# Altium PCB led-wt32-eth01.PcbDoc
Units mil, origin at the board's own origin, x right, y up, seen from the top; angles counter-clockwise.
Board outline 1889.76 x 2283.46 mil, 4 copper layers (Top Layer, Layer 1, Layer 2, Bottom Layer), stack 62.417 mil thick; 25 components, 25 nets, 122 pads, 46 vias.
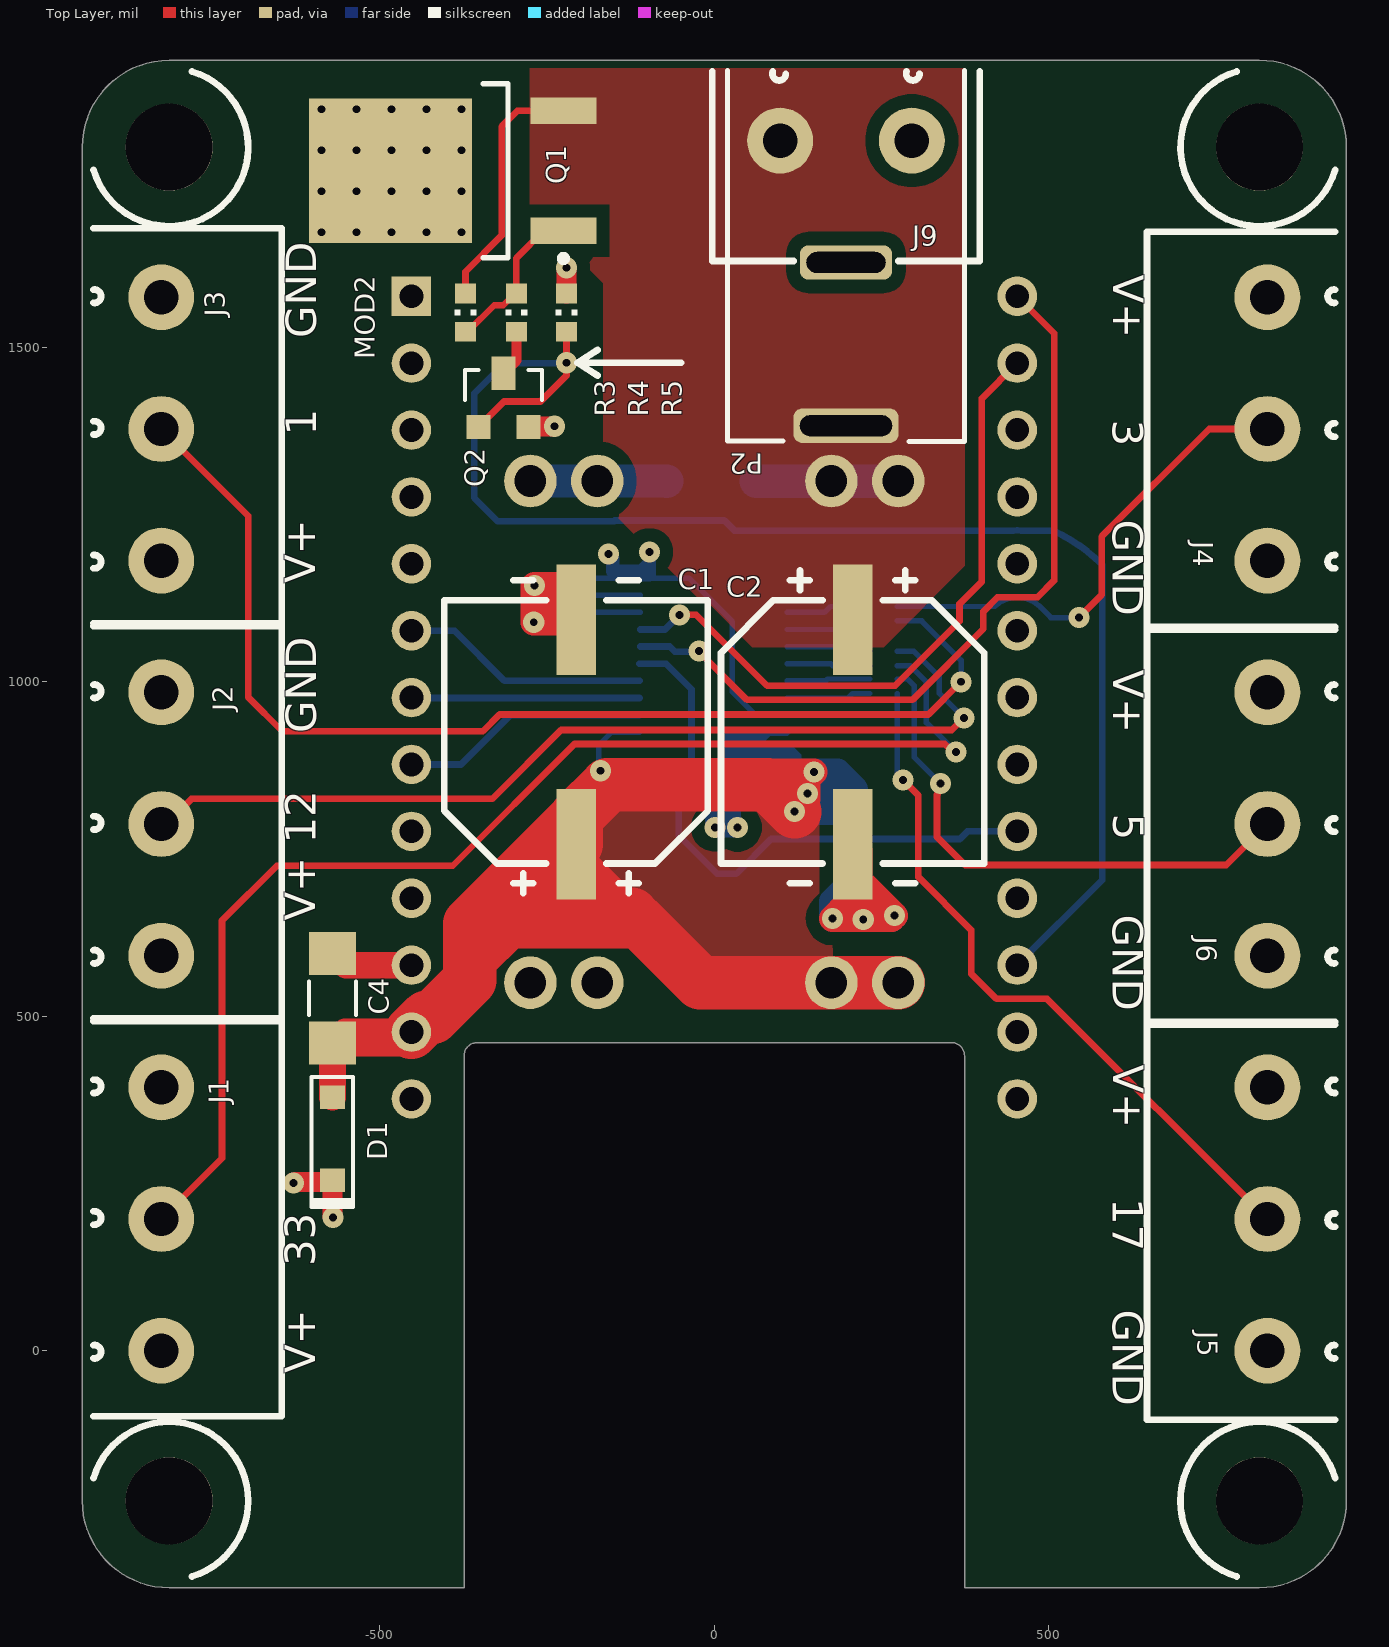
[diagram p0: Top Layer view]
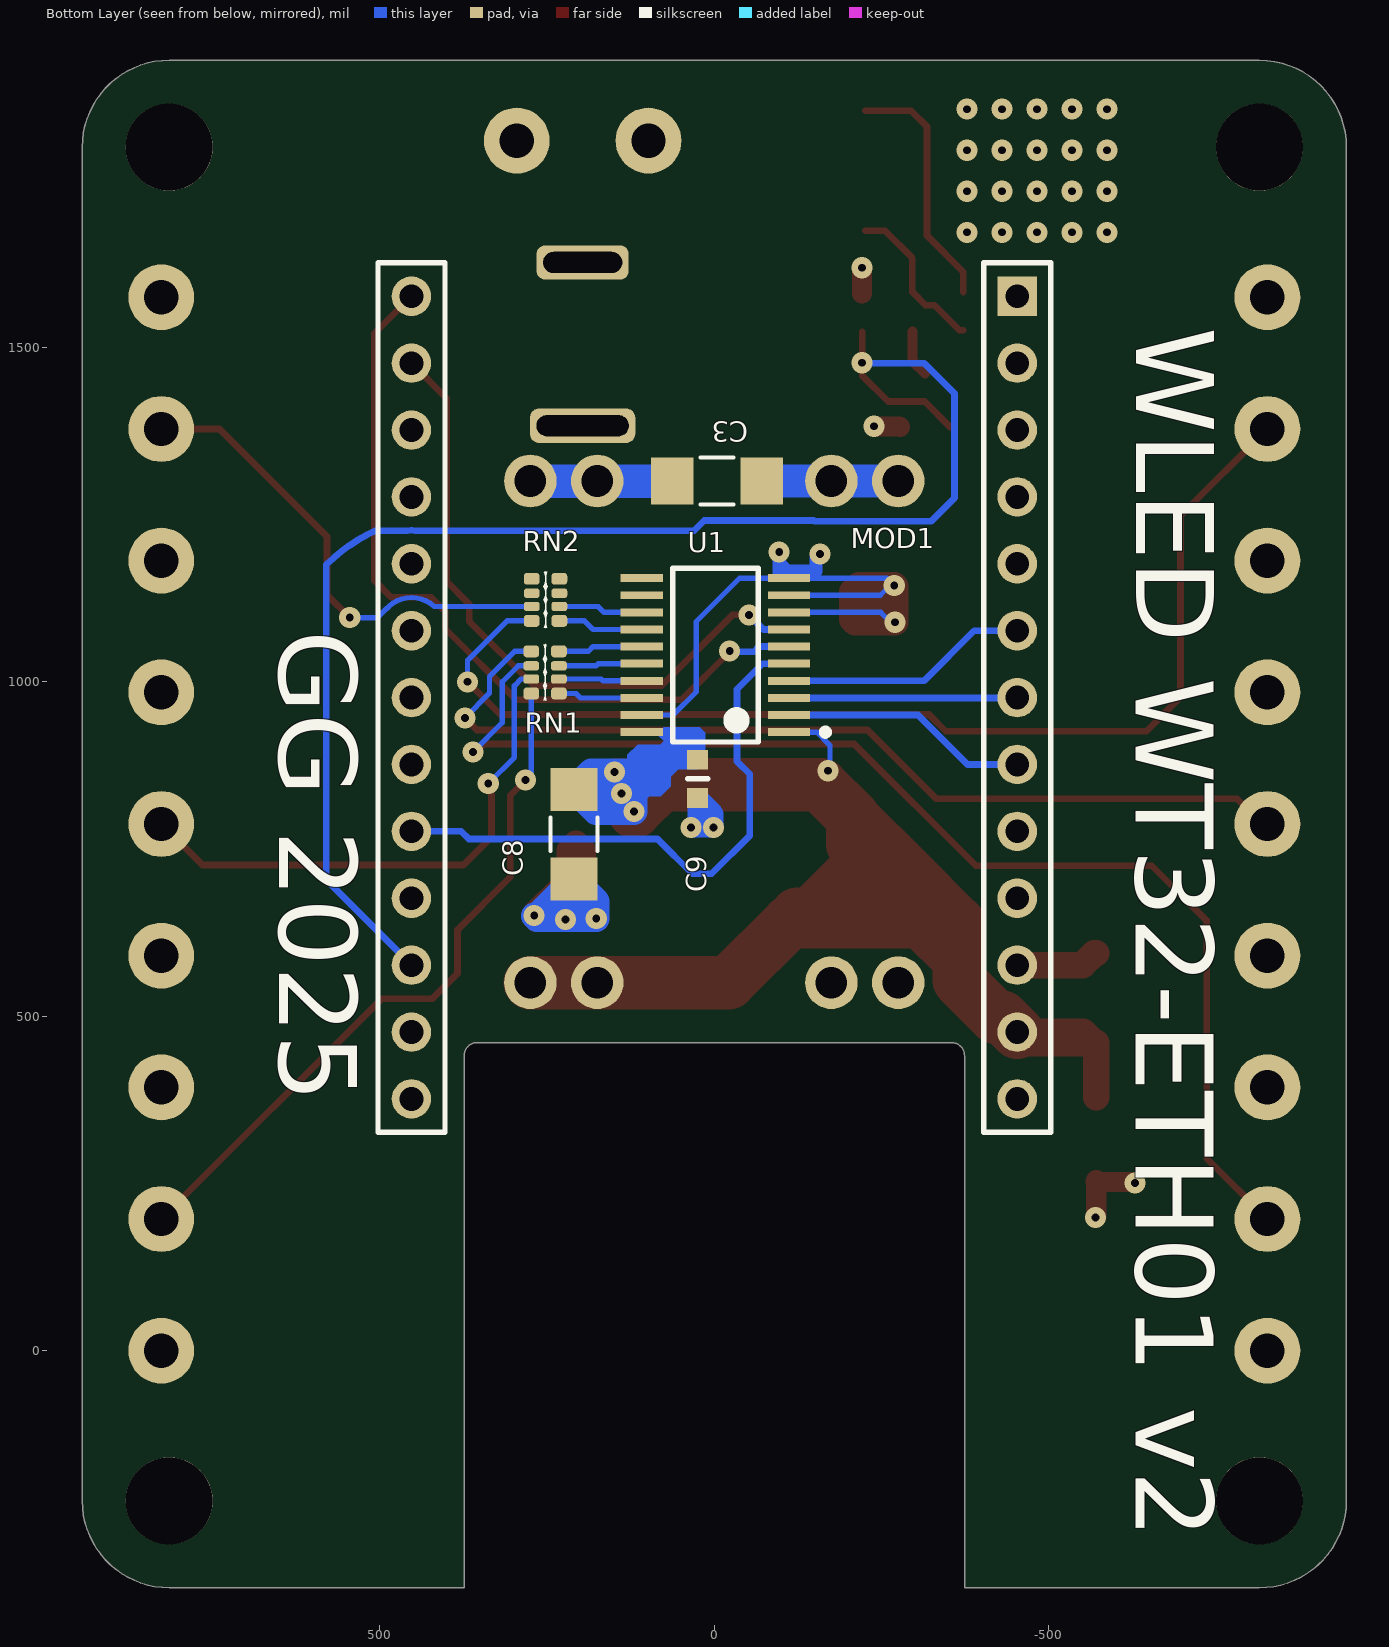
[diagram p1: Bottom Layer view, seen from below]
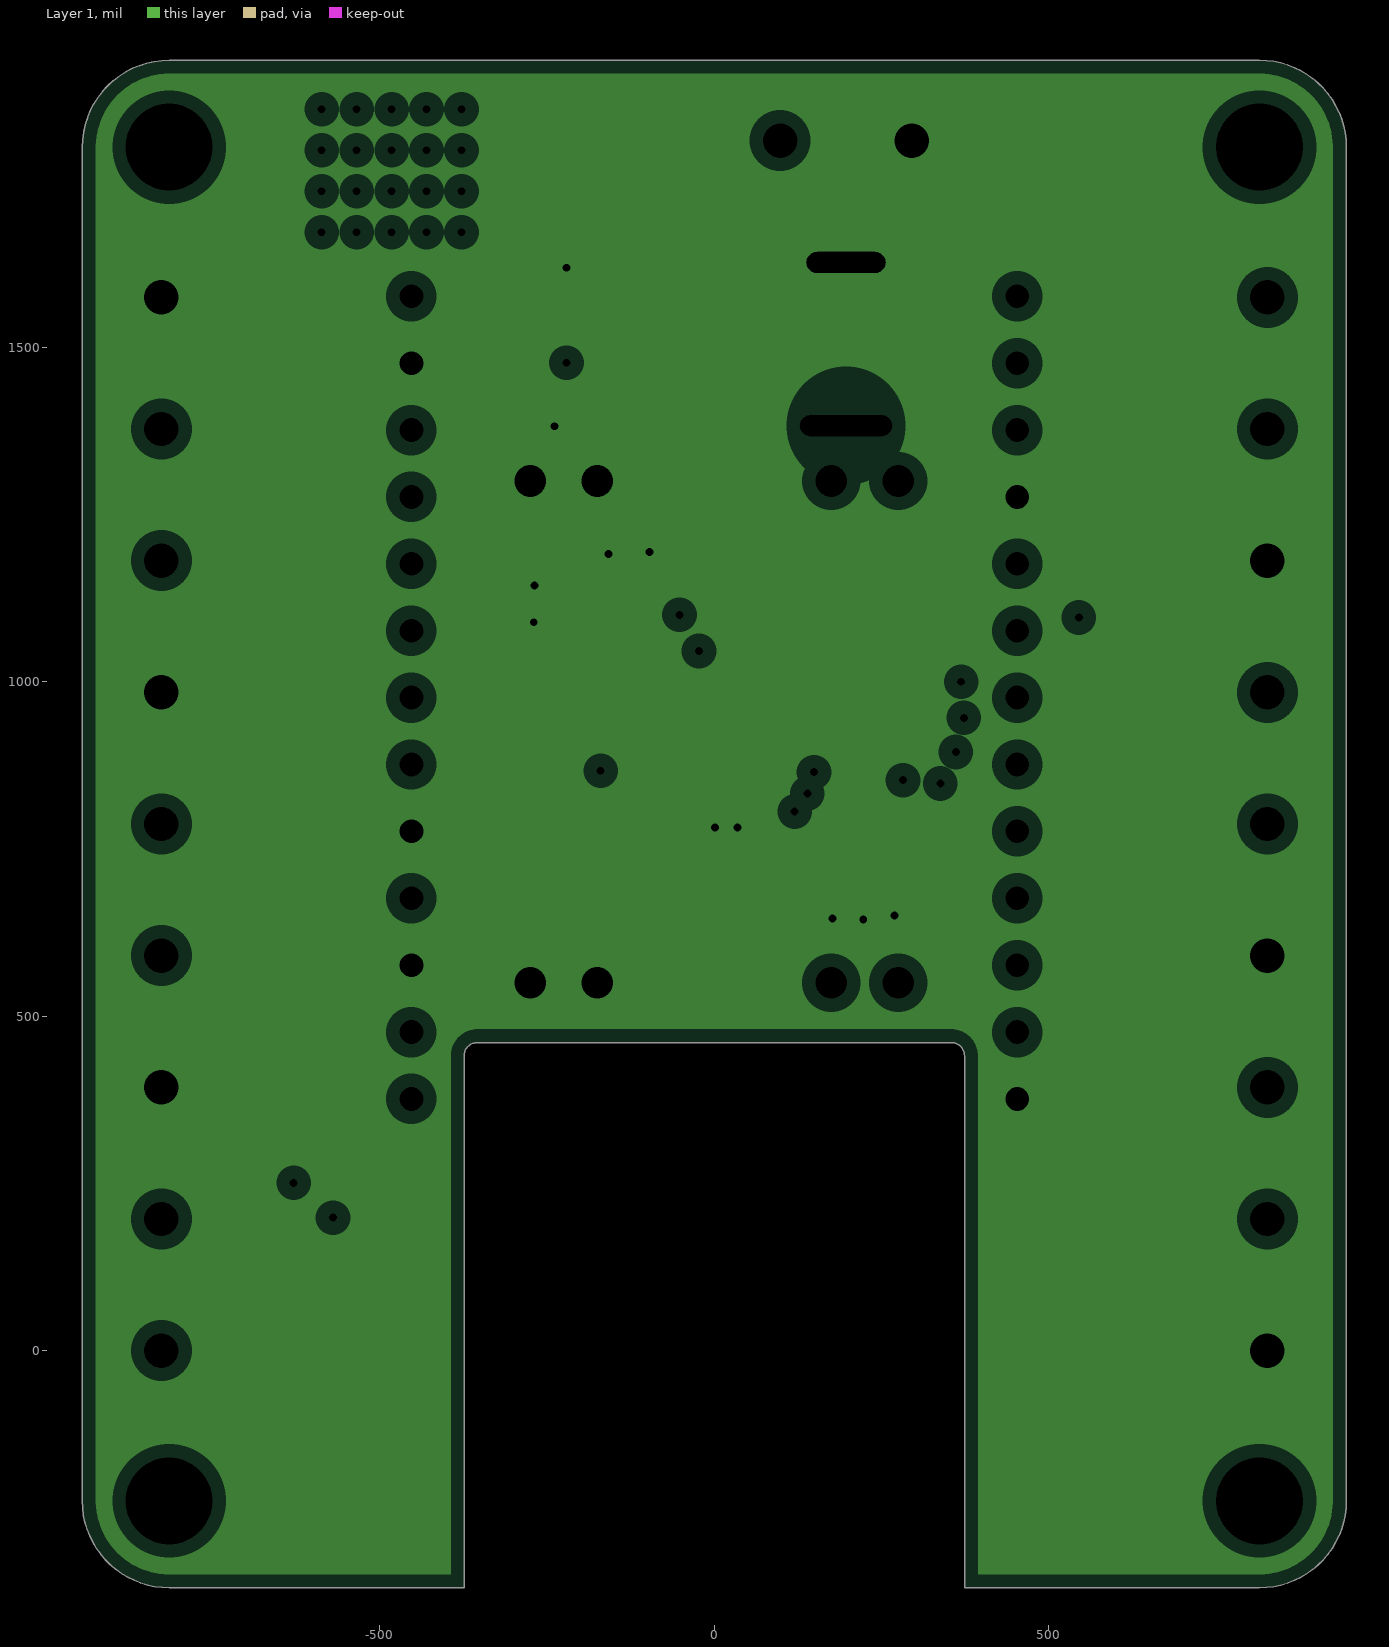
[diagram p2: Layer 1, clearances drawn from the general rule]
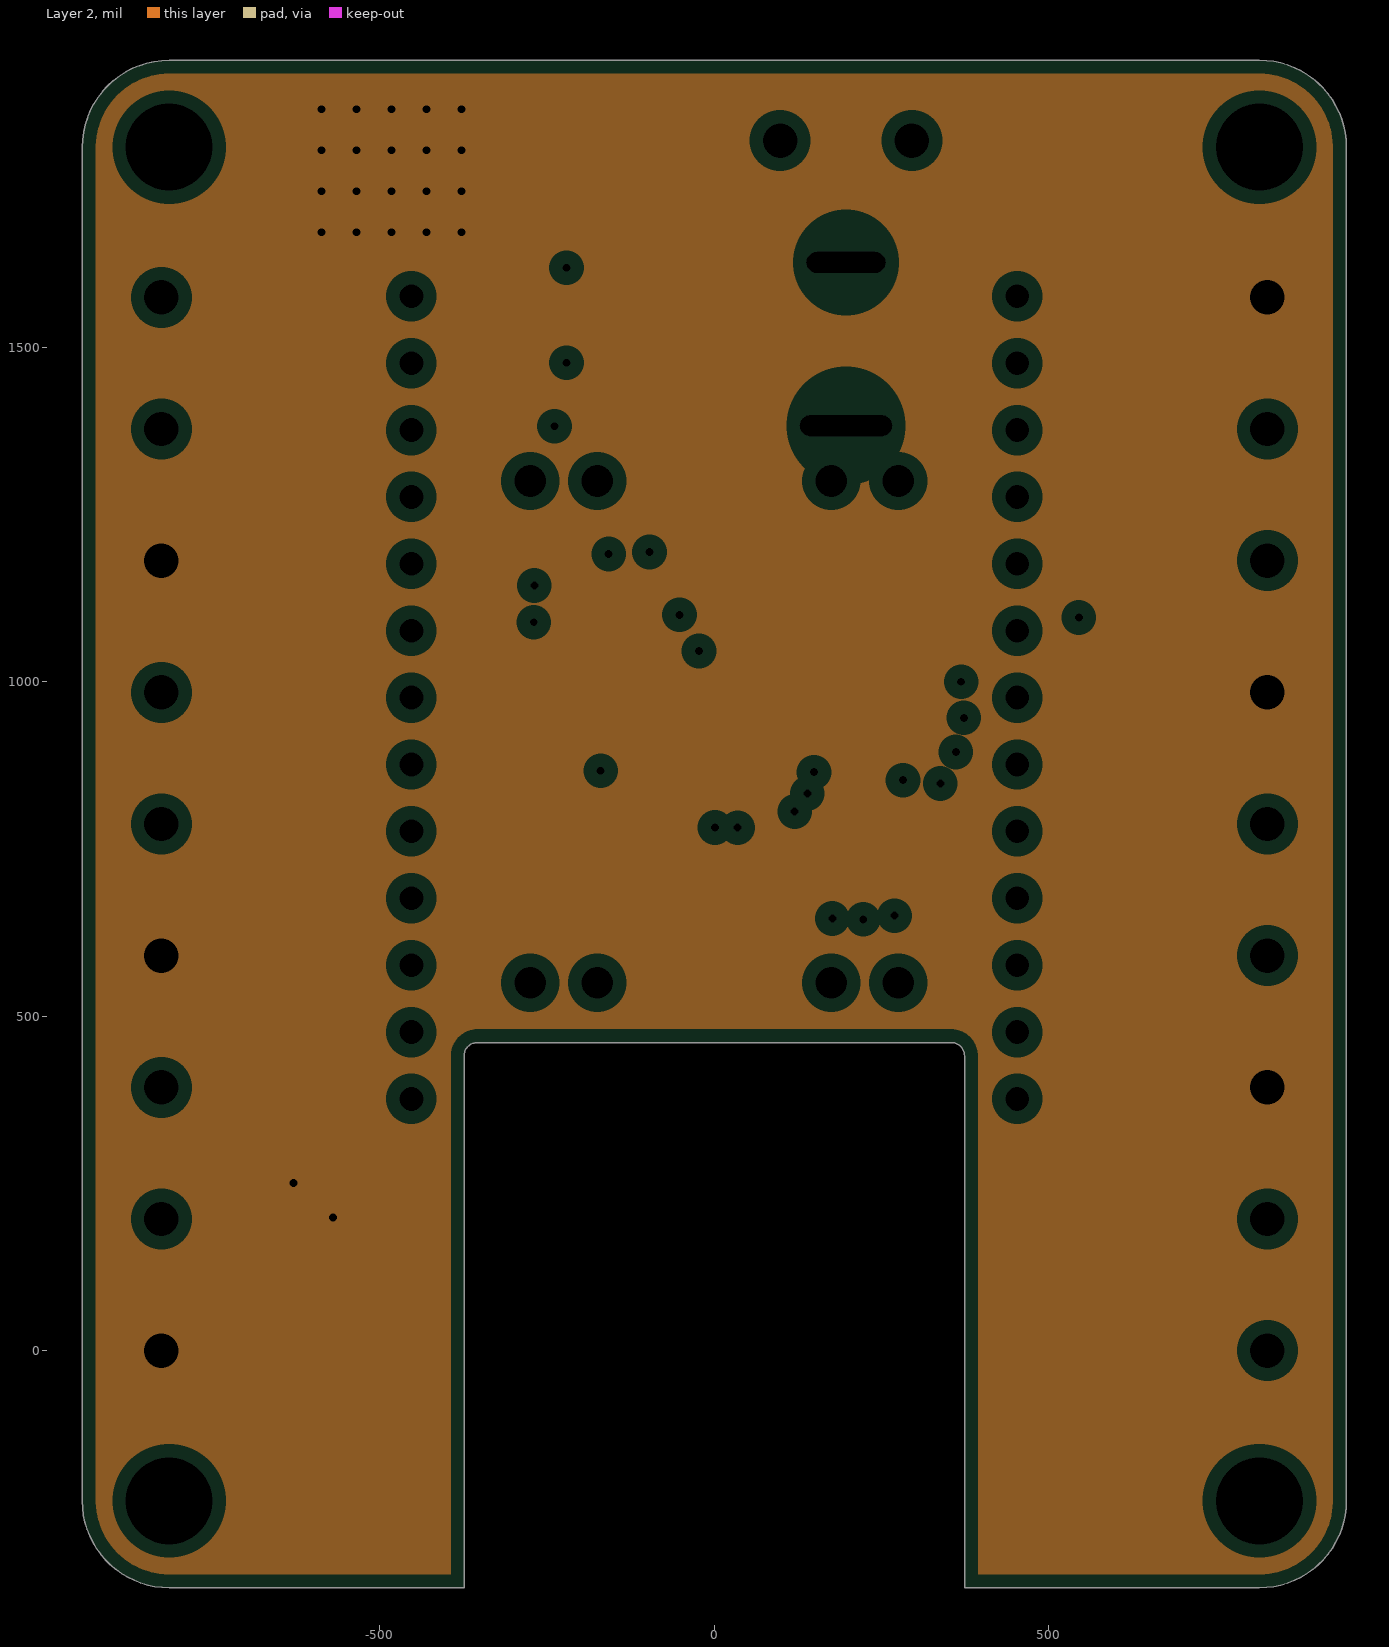
[diagram p3: Layer 2, clearances drawn from the general rule]
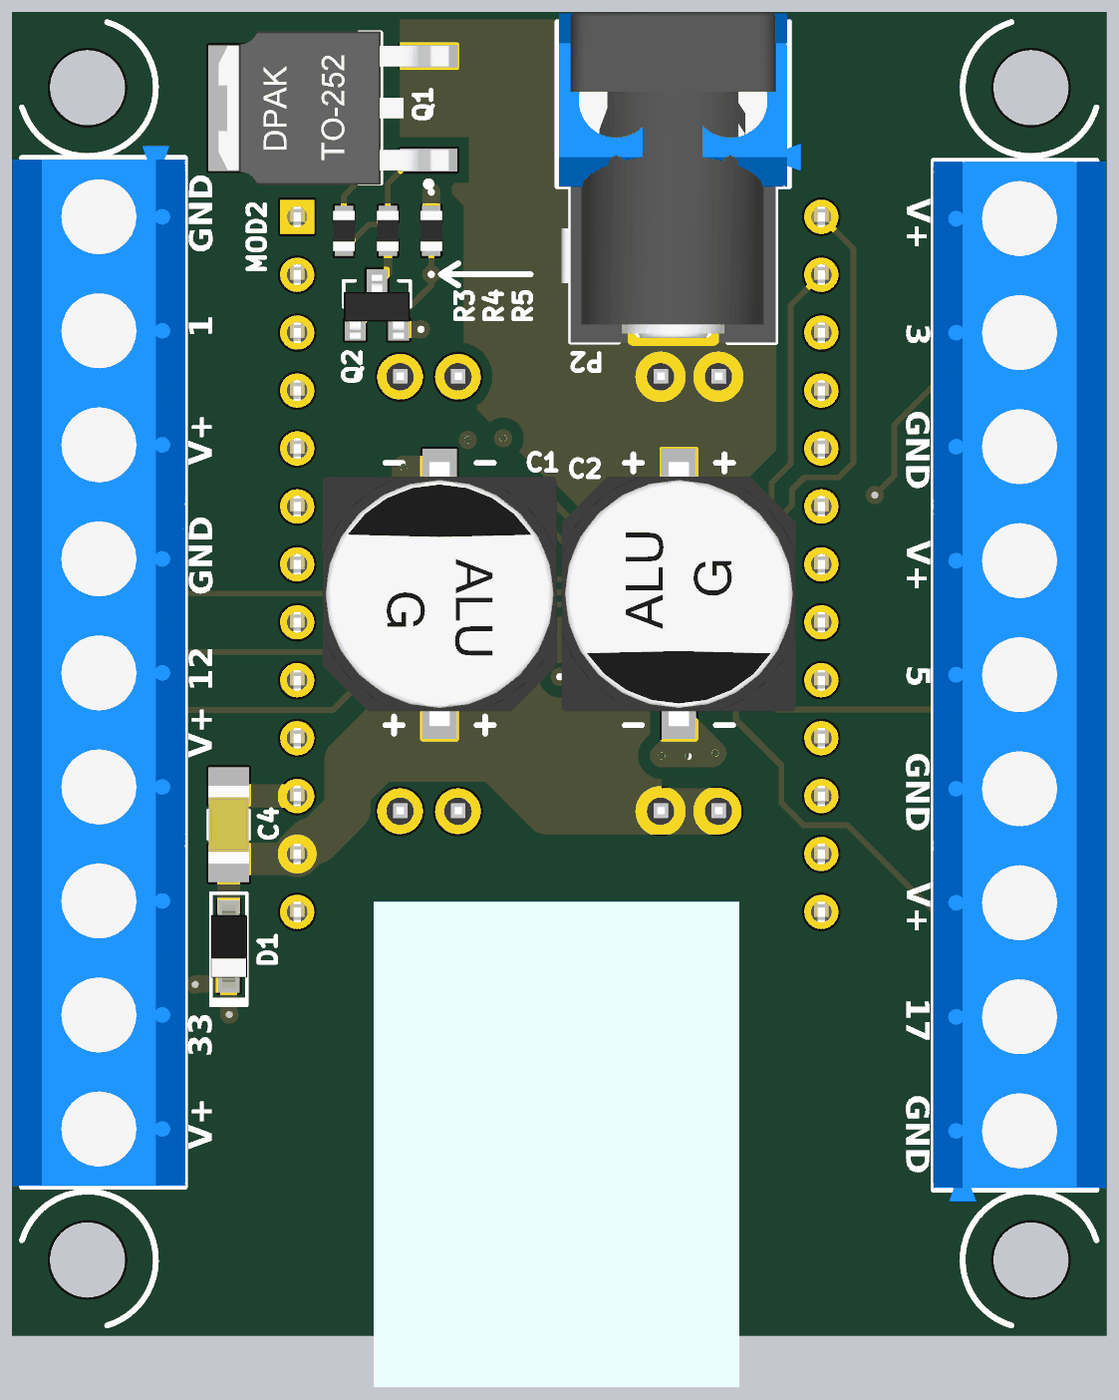
[diagram p4: 3D render of the assembled board from above, using the file's embedded part models]
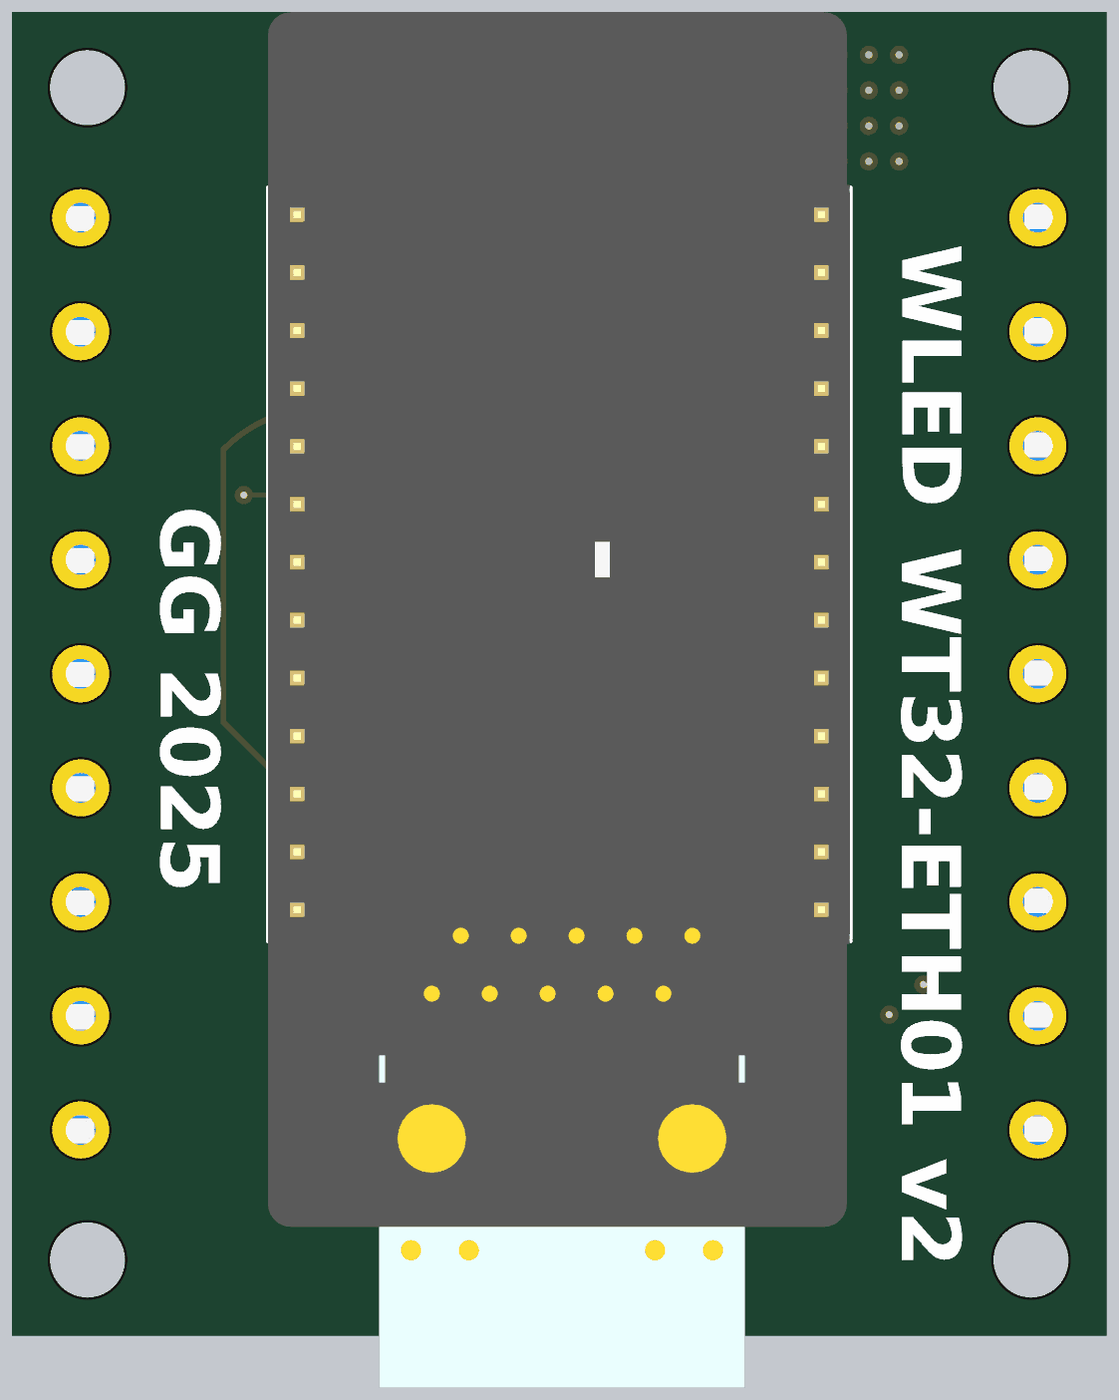
[diagram p5: 3D render of the assembled board from below, using the file's embedded part models]

## Layer stack, top to bottom
Top Solder: solder mask 0.4, Solder Resist, Dk 3.5
Top Layer: signal copper 1.378
Dielectric 2: prepreg 8.2677, PP-006, Dk 4.1
Layer 1: plane copper 0.5984, net GND
Dielectric 1: dielectric 41.9291, FR-4, Dk 4.8
Layer 2: plane copper 0.5984, net VLED
Dielectric 3: prepreg 8.2677, PP-006, Dk 4.1
Bottom Layer: signal copper 1.378
Bottom Solder: solder mask 0.4, Solder Resist, Dk 3.5

## Board outline
-814.96,-354.33 cw(c-814.96,-224.41) -944.88,-224.41 -944.88,1799.21 cw(c-814.96,1799.21) -814.96,1929.13 814.96,1929.13 cw(c814.96,1799.21) 944.88,1799.21 944.88,-224.41 cw(c814.96,-224.41) 814.96,-354.33 374.02,-354.33 374.02,440.94 ccw(c354.33,440.94) 354.33,460.63 -354.33,460.63 ccw(c-354.33,440.94) -374.02,440.94 -374.02,-354.33

## Design rules (kind name [scope] priority, off if disabled: settings)
BoardOutlineClearance [All] p1: gap=11.81 ignorepadtopadclearanceinfootprint=FALSE
Clearance Clearance_polygon [InPolygon] p1: gap=20 ignorepadtopadclearanceinfootprint=FALSE
Clearance [All] p2: gap=8 ignorepadtopadclearanceinfootprint=TRUE
ComponentClearance ComponentClearance_1 [InComponent('R6') vs InComponent('R8')] p1: gap=-39.37 collisioncheckmode=3 verticalgap=-39.37 showdistances=FALSE
ComponentClearance ComponentClearance_3 [HasFootprint('J_ARK3') vs HasFootprint('J_ARK3')] p2: gap=-39.37 collisioncheckmode=3 verticalgap=-39.37 showdistances=FALSE
ComponentClearance ComponentClearance_2 [HasFootprint('J_ARK2') vs HasFootprint('P_KLDX-0202-A')] p3: gap=-309.37 collisioncheckmode=3 verticalgap=-39.37 showdistances=FALSE
ComponentClearance ComponentClearance_4 [HasFootprint('MOD_BUCK_MP1584') vs HasFootprint('P_KLDX-0202-A')] p4: gap=-309.37 collisioncheckmode=3 verticalgap=-39.37 showdistances=FALSE
ComponentClearance ComponentClearance_5 [HasFootprint('CE_D_10x10_SMD') vs HasFootprint('CE_D_10x10_SMD')] p5: gap=1 collisioncheckmode=3 verticalgap=1 showdistances=FALSE
ComponentClearance [All] p6: gap=10 collisioncheckmode=3 verticalgap=10 showdistances=FALSE
HoleSize [All] p1: absolutevalues=TRUE maxlimit=157.48 minlimit=11.81 maxpercent=80.000 minpercent=20.000
MinimumAnnularRing [All] p1: minimumring=7
MinimumSolderMaskSliver [All] p1: minsoldermaskwidth=5
PlaneClearance [All] p1: clearance=20
PlaneConnect [All] p1: planeconnectstyle=Direct reliefexpansion=20 reliefentries=4 reliefconductorwidth=10 reliefairgap=10
PolygonConnect VIA [IsVia] p1: connectstyle=Direct reliefconductorwidth=10 reliefentries=4 polygonreliefangle="90 Angle" airgapwidth=10
PolygonConnect [All] p2: connectstyle=Direct reliefconductorwidth=30 reliefentries=4 polygonreliefangle="90 Angle" airgapwidth=15
RoutingVias [All] p1: holewidth=11.81 width=31.5 viastyle="Through Hole" minholewidth=11.81 minwidth=31.5 maxholewidth=11.81 maxwidth=31.5
SilkToSilkClearance [All] p1: silktosilkclearance=1
SilkToSolderMaskClearance [IsPad] p1: minsilkscreentomaskgap=1 clearancetoexposedcopper=TRUE
SolderMaskExpansion [All] p1: expansion=4 istentingtop=FALSE
SupplyNets "Schematic Supply Nets_1" [InNet('VLED')] p1: voltage=0.000
SupplyNets "Schematic Supply Nets_5" [InNet('VIN')] p2: voltage=0.000
SupplyNets "Schematic Supply Nets_2" [InNet('GND')] p3: voltage=0.000
SupplyNets "Schematic Supply Nets" [InNet('+5V')] p4: voltage=0.000
Width [All] p1: maxlimit=150 minlimit=7 preferedwidth=10 minimp=50.000000 maximp=50.000000 favimp=50.000000
23 further rules are at their usual default settings.

## Components (designator, comment, footprint, x,y, rotation, side; value= is the part's Value field where it differs from the comment)
C1 "Electrolytic Capacitor" CE_D_10x10_SMD 206.69,925.2 r270 top locked value=100uF
C2 "Electrolytic Capacitor" CE_D_10x10_SMD -206.69,925.2 r90 top locked value=100uF
C3 "Ceramic X7R" C_1206_3216 -4,1300 r180 bottom value=10uF
C4 "Ceramic X7R" C_1206_3216 -571,527 r90 top value=10uF
C8 "Ceramic X7R" C_1206_3216 210,772 r270 bottom value=10uF
C9 "Ceramic X7R" C_0603_1608 24.85,855 r270 bottom value=100nF
D1 "1N4148W" SOD123 -571,317 r90 top value=1N4148W-E3-08
J1 "ARK3" J_ARK3 -826.77,196.85 r90 top locked value=DG301-5.0-03P-12-18A(H)
J2 "ARK3" J_ARK3 -826.77,787.4 r90 top locked value=DG301-5.0-03P-12-18A(H)
J3 "ARK3" J_ARK3 -826.77,1377.95 r90 top locked value=DG301-5.0-03P-12-18A(H)
J4 "ARK3" J_ARK3 826.77,1377.95 r270 top locked value=DG301-5.0-03P-12-18A(H)
J5 "ARK3" J_ARK3 826.77,196.85 r270 top locked value=DG301-5.0-03P-12-18A(H)
J6 "ARK3" J_ARK3 826.77,787.4 r270 top locked value=DG301-5.0-03P-12-18A(H)
J9 "ARK2" J_ARK2 196.85,1809 r0 top value=DG301-5.0-02P-12-18A(H)
MOD1 "Low cost, Aliexpress-ready DC-DC buck converter using MP1584" MOD_BUCK_MP1584 0,925.2 r270 bottom locked value=-
MOD2 "ESP32 with 10/100 Mbps Ethernet PHY" MOD_WT32-ETH01 0,976.38 r0 top locked value=MOD_WT32-ETH01
P2 "DC JACK" P_KLDX-0202-A 196.85,1626.9 r90 top locked value=KLDX-0202-A
Q1 "AOD423" DPAK_TO252-3_SC63_M -391,1764 r180 top
Q2 "2N7002K-7" SOT23_TO236_SC59 -315,1421 r0 top
R3 "Resistor" R_0603_1608 -372,1552 r90 top value=10k
R4 "Resistor" R_0603_1608 -296,1552 r270 top value=10k
R5 "Resistor" R_0603_1608 -221,1552 r90 top value=10k
RN1 "Resistors Network" RN4_0804_2010 253,1014 r0 bottom value=120R
RN2 "Resistors Network" RN4_0804_2010 252.33,1122.5 r0 bottom value=120R
U1 "SN74HCT245PWR" FP-PW0020A-MFG -1.64,1039.84 r0 bottom locked

## Footprints (in the part's own frame and the unit in brackets; to place one, negate y for a bottom-side part, rotate by r counter-clockwise, add the part's x,y. Pads: shape width x height; smd on the part's side, far side on the other; paste and mask are expansions set on the pad)
C_0603_1608 [mm]
  rect 0.75x0.8 smd: 1(-0.725,0) 2(0.725,0)
  silkscreen extent 0,-0.38 0,0.38, body extent -0.85,-0.45 0.85,0.45, height 0.89
C_1206_3216 [mil]
  rect 64x70 smd: 1(-67,0) 2(67,0)
  silkscreen extent -25,-35 25,35, body extent -67,-35 67,35, height 39
CE_D_10x10_SMD [mm]
  rect 4.2x1.5 smd: 1(-4.262,0) 2(4.262,0)
  silkscreen extent -6.13,-5 5.75,5, body extent -5.8,-5.15 5.8,5.15, height 10.21
DPAK_TO252-3_SC63_M [mm] "D-PAK, 3-Pads+1-heatsink, Body 6,20x6,60mm (max), IPC Medium Density"
  rect 2.5x1 smd: 1(-4.2,2.28) 3(-4.2,-2.28)
  rect 6.2x5.5 smd: 2(2.362,0)
  silkscreen extent -4.33,-3.3 -1.15,3.45, body extent -5.08,-3.37 5.02,3.37, height 2.37
FP-PW0020A-MFG [mm]
  rect 1.6x0.3 smd paste-1000 mask+0: 1(-2.8,2.925) 2(-2.8,2.275) 3(-2.8,1.625) 4(-2.8,0.975) 5(-2.8,0.325) 6(-2.8,-0.325) 7(-2.8,-0.975) 8(-2.8,-1.625) 9(-2.8,-2.275) 10(-2.8,-2.925) 11(2.8,-2.925) 12(2.8,-2.275) 13(2.8,-1.625) 14(2.8,-0.975) 15(2.8,-0.325) 16(2.8,0.325) 17(2.8,0.975) 18(2.8,1.625) 19(2.8,2.275) 20(2.8,2.925)
  silkscreen extent -4.3,-3.3 1.63,3.3, body extent -3.2,-3.25 3.2,3.25, height 1.2
J_ARK2 [mm]
  round 2.5 hole 1.3: 1(-2.5,0) 2(2.5,0)
  silkscreen extent -5.08,-4.57 5.08,2.62, body extent -5,-4.6 5.6,3, height 10.05
J_ARK3 [mm]
  round 2.5 hole 1.3: 1(-5,0) 2(0,0) 3(5,0)
  silkscreen extent -7.49,-4.57 7.62,2.57, body extent -7.46,-4.6 8.14,3, height 10.05
MOD_BUCK_MP1584 [mm] "Normal"
  round 2 hole 1.2: 1(-9.525,-6.985) 2(-9.525,-4.445) 3(-9.525,4.445) 4(-9.525,6.985) 5(9.525,-6.985) 6(9.525,-4.445) 7(9.525,4.445) 8(9.525,6.985)
  body extent -11.25,-8.65 11.25,8.65, height 6.69
MOD_WT32-ETH01 [mm]
  rect 1.5x1.5 hole 0.9: 1(-11.5,15.24)
  round 1.5 hole 0.9: 2(-11.5,12.7) 3(-11.5,10.16) 4(-11.5,7.62) 5(-11.5,5.08) 6(-11.5,2.54) 7(-11.5,0) 8(-11.5,-2.54) 9(-11.5,-5.08) 10(-11.5,-7.62) 11(-11.5,-10.16) 12(-11.5,-12.7) 13(-11.5,-15.24) 14(11.5,-15.24) 15(11.5,-12.7) 16(11.5,-10.16) 17(11.5,-7.62) 18(11.5,-5.08) 19(11.5,-2.54) 20(11.5,0) 21(11.5,2.54) 22(11.5,5.08) 23(11.5,7.62) 24(11.5,10.16) 25(11.5,12.7) 26(11.5,15.24)
  body extent -12.75,-36.09 12.78,24.21, height 14.2
P_KLDX-0202-A [mm] "Connector; DC JACK"
  rrect50% 1.3x4 hole 0.8 slot 3.5 at 90 deg: 1(-6.2,0)
  rrect50% 1.3x3.5 hole 0.8 slot 3 at 90 deg: 2(0,0)
  silkscreen extent -6.8,-4.5 7.28,4.5, body extent -6.8,-4.5 7.7,4.9, height 10.8
R_0603_1608 [mm]
  rect 0.75x0.8 smd: 1(-0.725,0) 2(0.725,0)
  silkscreen extent -0.1,-0.41 0.1,0.41, body extent -0.87,-0.47 0.88,0.48, height 0.54
RN4_0804_2010 [mm]
  rrect55% 0.6x0.45 smd mask+0.05: 1(-0.525,0.8) 4(-0.525,-0.8) 5(0.525,-0.8) 8(0.525,0.8)
  rrect55% 0.6x0.35 smd mask+0.05: 2(-0.525,0.25) 3(-0.525,-0.25) 6(0.525,-0.25) 7(0.525,0.25)
  silkscreen extent -0.08,-1.08 0.08,1.08, body extent -0.5,-1 0.5,1, height 0.45
SOD123 [mm]
  rect 0.9x0.95 smd: 1(-1.575,0) 2(1.575,0)
  silkscreen extent -2.59,-0.79 2.34,0.79, body extent -1.86,-0.81 1.84,0.79, height 1.27
SOT23_TO236_SC59 [mil]
  rect 36x36 smd: 1(-37.5,-40) 2(37.5,-40)
  rect 36x50 smd: 3(0,40)
  silkscreen extent -57,0 58,45, body extent -57,-55 57,55, height 51

## Part data
C1 C2: library part CE_100uF_50V_AL2O3_10x10_20, "Polarized Capacitor", Dielectric=AL2O3, Manufacturer=Nichicon, Manufacturer Part Number=UUX1H101MNL1GS, Tolerance (%)=20, Voltage=50V, HelpURL=https://datasheet.octopart.com/UUX1H101MNL1GS-Nichicon-datasheet-62047998.pdf, Part Number=CE_100uF_50V_AL2O3_10x10_20, SCH_Footprint=10x10, Supplier 1=TME, Supplier 2="RS Components", Supplier 3=Farnell, Supplier 4=Mouser, Supplier 5=Digi-Key, Supplier 6=LCSC, Supplier Part Number 1=UUX1H101MNL1GS, Supplier Part Number 2=7393107, Supplier Part Number 3=2841943, Supplier Part Number 4=647-UUX1H101MNL1GS, Supplier Part Number 5=493-6269-1-ND
C3 C4 C8: library part C_10uF_25V_X7R_1206_10, "Capacitor", Dielectric=X7R, Manufacturer=Samsung, Manufacturer Part Number=CL31B106KAHNNNE, Tolerance (%)=10, Voltage=25V, HelpURL=http://www.tme.eu/pl/Document/4a42202b32dab16128fe107dd69598cc/samsung-chip-cap.pdf, Part Number=C_10uF_25V_X7R_1206_10, SCH_Footprint=1206, Supplier 1=TME, Supplier 2="RS Components", Supplier 3=Farnell, Supplier 4=Mouser, Supplier 5=Digi-Key, Supplier 6=LCSC, Supplier Part Number 1=CL31B106KAHNNNE, Supplier Part Number 2=766-6773, Supplier Part Number 3=3013526, Supplier Part Number 4=187-CL31B106KAHNNNE, Supplier Part Number 5=1276-1804-1-ND
C9: library part C_100nF_50V_X7R_0603_5, "Capacitor", Dielectric=X7R, Manufacturer=Samsung, Manufacturer Part Number=CL10B104JB8NNNC, Tolerance (%)=5, Voltage=50V, HelpURL=http://www.tme.eu/pl/Document/4a42202b32dab16128fe107dd69598cc/samsung-chip-cap.pdf, Part Number=C_100nF_50V_X7R_0603_5, SCH_Footprint=0603, Supplier 1=TME, Supplier 2="RS Components", Supplier 3=Farnell, Supplier 4=Mouser, Supplier 5=Digi-Key, Supplier 6=LCSC, Supplier Part Number 1=CL10B104JB8NNNC, Supplier Part Number 2=7665455, Supplier Part Number 5=1276-1033-1-ND, Supplier Part Number 6=C24452
D1: library part D_1N4148W_0A15_75V_SOD123, Current=0.15A, Manufacturer=Vishay, Manufacturer Part Number=1N4148W-E3-08, Voltage=75, HelpURL=https://datasheet.octopart.com/1N4148W-E3-08-Vishay-datasheet-17291302.pdf, Part Number=D_1N4148W_0A15_75V_SOD123, SCH_Footprint=SOD123, Supplier 1=TME, Supplier 2="RS Components", Supplier 3=Farnell, Supplier 4=Mouser, Supplier 5=Digi-Key, Supplier 6=LCSC, Supplier Part Number 1=1N4148W-E3-08, Supplier Part Number 2=7003671, Supplier Part Number 3=2433353, Supplier Part Number 4=78-1N4148W-E3-08, Supplier Part Number 5=1N4148W-E3-08CT-ND
J1 J2 J3 J4 J5 J6: library part J_TB-5.0-P-3P, "ARK Screw terminal, 3-Pin", Manufacturer="DEGSON ELECTRONICS", Manufacturer Part Number=DG301-5.0-03P-12-18A(H), Supplier Part Number 1=DG301-5.0-3/6B, HelpURL=https://datasheet.octopart.com/DG301-5.0-03P-12-18A%28H%29-Degson-datasheet-17801202.pdf, Part Number=J_TB-5.0-P-3P, SCH_Footprint=ARK3, Supplier 1=TME, Supplier 2="RS Components", Supplier 3=Farnell, Supplier 4=Mouser, Supplier 5=Digi-Key, Supplier 6=LCSC
J9: library part J_TB-5.0-P-2P, "ARK Screw terminal, 2-Pin", Manufacturer="DEGSON ELECTRONICS", Manufacturer Part Number=DG301-5.0-02P-12-18A(H), Supplier Part Number 1=DG301-5.0-2/6B, HelpURL=https://datasheet.octopart.com/DG301-5.0-03P-12-18A%28H%29-Degson-datasheet-17801202.pdf, Part Number=J_TB-5.0-P-2P, SCH_Footprint=ARK2, Supplier 1=TME, Supplier 2="RS Components", Supplier 3=Farnell, Supplier 4=Mouser, Supplier 5=Digi-Key, Supplier 6=LCSC
MOD1: library part MOD_BUCK_MP1584, Manufacturer=-, HelpURL=https://pl.aliexpress.com/item/32341006065.html, Manufacturer Part Number=-, Part Number=MOD_BUCK_MP1584, SCH_Footprint=17.3x22.5mm, Supplier 1=TME, Supplier 2="RS Components", Supplier 3=Farnell, Supplier 4=Mouser, Supplier 5=Digi-Key, Supplier 6=LCSC, Supplier 7=-, Supplier Part Number 7=-
MOD2: library part MOD_WT32-ETH01, Manufacturer=WT, HelpURL=https://github.com/egnor/wt32-eth01, Manufacturer Part Number=MOD_WT32-ETH01, Part Number=MOD_WT32-ETH01, SCH_Footprint=60x25.5mm, Supplier 1=TME, Supplier 2="RS Components", Supplier 3=Farnell, Supplier 4=Mouser, Supplier 5=Digi-Key, Supplier 6=LCSC, Supplier 7=Aliexpress, Supplier Part Number 7=-
P2: library part P_KLDX-0202-A, "Typical 3-pin jack power connector with switch", Manufacturer=Kycon, Manufacturer Part Number=KLDX-0202-A, HelpURL=http://www.kycon.com/2013Catalogpage/DC%20Power/KLDX_0202.pdf, Part Number=P_KLDX-0202-A, SCH_Footprint=THT, Supplier 1=TME, Supplier 2="RS Components", Supplier 3=Farnell, Supplier 4=Mouser, Supplier 5=Digi-Key, Supplier 6=LCSC, Supplier Part Number 3=2839850, Supplier Part Number 4=806-KLDX-0202-A, Supplier Part Number 5=2092-KLDX-0202-A-ND
Q1: library part QP_AOD423, Current=67A, Manufacturer="Alpha&Omega Semiconductor", Voltage=30V, HelpURL=https://www.aosmd.com/sites/default/files/res/datasheets/AOI423.pdf, Manufacturer Part Number=AOD423, Part Number=QP_AOD423, SCH_Footprint=TO252, Supplier 1=TME, Supplier 2="RS Components", Supplier 3=Farnell, Supplier 4=Mouser, Supplier 5=Digi-Key, Supplier 6=LCSC, Supplier Part Number 1=AOD423, Type=P-MOS
Q2: library part QN_2N7002K-7, Current=0A8, Manufacturer="Diodes Inc", Voltage=60V, HelpURL=http://datasheet.octopart.com/2N7002K-7-Diodes-Inc.-datasheet-12515815.pdf, Manufacturer Part Number=2N7002K-7, Part Number=QN_2N7002K-7, SCH_Footprint=SOT23, Supplier 1=TME, Supplier 2="RS Components", Supplier 3=Farnell, Supplier 4=Mouser, Supplier 5=Digi-Key, Supplier 6=LCSC, Supplier Part Number 2=7703383, Supplier Part Number 3=1713825, Supplier Part Number 4=621-2N7002K-7, Supplier Part Number 5=2N7002K-7DICT-ND, Type=N-MOS
R3 R4 R5: library part R_10k_0603_1, Manufacturer=Vishay, Manufacturer Part Number=CRCW060310K0FKTA, Power=100mW, Supplier Part Number 1=CRCW060310K0FKTABC, Tolerance=1%, Voltage=75V, HelpURL=https://octopart.com/datasheet/crcw060310k0fkta-vishay-39447548, Part Number=R_10k_0603_1, SCH_Footprint=0603, Supplier 1=TME, Supplier 2="RS Components", Supplier 3=Farnell, Supplier 4=Mouser, Supplier 5=Digi-Key, Supplier 6=LCSC, Supplier Part Number 3=1652827, Supplier Part Number 4=71-CRCW0603-10K, Supplier Part Number 5=541-2980-1-ND
RN1 RN2: library part RN4_120R_0804_5, Manufacturer=Panasonic, Manufacturer Part Number=EXB-28V121JX, Power=63mW, Tolerance=5%, Voltage=50V, HelpURL=http://industrial.panasonic.com/cdbs/www-data/pdf/AOC0000/AOC0000C14.pdf, Part Number=RN4_120R_0804_5, SCH_Footprint=0804, Supplier 1=TME, Supplier 2="RS Components", Supplier 3=Farnell, Supplier 4=Mouser, Supplier 5=Digi-Key, Supplier 6=LCSC, Supplier Part Number 3=2060045, Supplier Part Number 4=667-EXB-28V121JX, Supplier Part Number 5=Y7121CT-ND
U1: library part CMP-1620-00542-3, "IC TXRX NON-INVERT 5.5V 20TSSOP", Case/Package=TSSOP, High Level Output Current=-6mA, Low Level Output Current=6mA, Max Operating Temperature=85°C, Max Supply Voltage=5.5V, Min Operating Temperature=-40°C, Min Supply Voltage=4.5V, Operating Supply Voltage=5V, Package Quantity=2000, Quiescent Current=8uA, Contact Plating=Gold, Direction=Bidirectional, Lead Free="Lead Free", Logic Function=Transceiver, Mount="Surface Mount", Number of Bits=8, Number of Bits per Element=8, Number of Channels=8, Number of Circuits=8, Number of Elements=1, Number of Outputs=8, Number of Pins=20, Packaging="Tape and Reel", Polarity=Non-Inverting, Propagation Delay=74ns, Radiation Hardening=No, REACH SVHC="No SVHC", Turn-On Delay Time=74ns, Weight=0.002716oz

## Free pads (board coordinates)
  round 129.92 hole 129.92 unplated: ""(-814.96,-224.41) ""(-814.96,1799.21) ""(814.96,-224.41) ""(814.96,1799.21)

## Via types
v1: diameter 31.5, hole 11.81, Top Layer to Bottom Layer, tented both sides, 46 vias

## Nets (pads, with @x,y where several pads share a name; then routed paths per layer and width w, separated by ;. In a path a pad name is that pad's centre, name@x,y a point inside that pad or via, vN(x,y) a via of type N, cw(c..) or ccw(c..) an arc to the next point about the centre after c; other vN are vias at no path point)
+5V: C2.1 C4.1 C8.1 C9.1 D1.2 MOD1.5 MOD1.6 MOD2.12 U1.1 U1.20 | length 3136.9
  Top Layer w40: D1.2 C4.1 C4.1@-568,460 ; MOD2.12 MOD2.12@-457.91,476.38 ; -110.11,846 -91.11,865 v1(149,865) v1@139,855 ; C4.1@-568,460 -474.29,460 MOD2.12@-457.91,476.38 ; C4.1@-568,460 -551.62,476.38 MOD2.12@-457.91,476.38 ; v1@139,855 120,836 v1(120,806) 139,825 v1(139,833) v1@139,855
  Top Layer w80: MOD2.12 -430.28,498.85 -420.64,498.85 -365.92,553.58 -365.92,585.26 ; C2.1 C2.1@-206.69,797.31 ; -123.69,652.69 -144.66,652.69 -206.69,714.72 -289.28,714.72 ; v1(120,806) 80,846 -110.11,846 -159.83,846 ; MOD1.5 MOD1.6 -21.2,550.2 -112.18,641.18 -310,641.18 ; -365.92,585.26 -365.92,638.08 -362.82,641.18 ; -365.92,585.26 -310,641.18 ; -362.82,641.18 -310,641.18 ; -362.82,641.18 -289.28,714.72 ; -289.28,714.72 C2.1@-206.69,797.31 ; C2.1@-206.69,797.31 -206.69,799.14 -159.83,846 ; C2.1@-206.69,797.31 -159.83,844.17 -159.83,846
  Bottom Layer w8: v1(-170,867) -173,870 -173,905 -153.32,924.68 U1.1
  Bottom Layer w40: MOD2.12@-457.91,476.38 MOD2.12 ; v1@129.85,840.85 v1@149,860 ; v1(120,806) 177,806 C8.1 ; v1(120,806) 120,833.85 94.85,859 100.85,865 v1(149,865) ; v1(120,806) 139,825 v1(139,833) v1@145,839 ; v1@145,839 149,843 v1@149,860 ; v1@145,839 C8.1 ; v1@149,860 v1(149,865) ; v1(149,865) 184,865 C8.1
GND: C1.2 C2.2 C3.2 C4.2 C8.2 C9.2 J1.3 J2.3 J3.3 J4.3 J5.3 J6.3 J9.2 MOD1.3 MOD1.4 MOD1.7 MOD1.8 MOD2.2 MOD2.9 MOD2.11 MOD2.14 MOD2.23 P2.2 Q2.2 R5.2 U1.8 U1.9 U1.10 U1.19 | length 2587.4
  Top Layer w30: Q2.2 -276.79,1381.71 -239.29,1381.71 v1(-239,1382) ; R5.2 v1(-221,1619)
  Top Layer w40: C4.2 -568,594 -550.38,576.38 MOD2.11 ; -236.22,1113.58 -238.64,1116 -270,1116 ; -270,1116 -270,1143 v1(-269,1144) -216.22,1144 -206.69,1134.47 C2.2 -210.69,1089 v1(-270,1089) -270,1116 ; C1.2 216.22,747.87 C1.2@216.22,694.72 ; C1.2 206.69,704.25 C1.2@216.22,694.72 ; C1.2 197.17,747.87 197.17,666.84 v1(176.53,646.2) v1@227,646.2 ; C1.2@216.22,694.72 216.22,677.73 227,666.96 v1@227,646.2 ; C1.2@216.22,694.72 224.93,694.72 v1(269.27,650.38) 265.09,646.2 v1@227,646.2
  Bottom Layer w8: v1(-270,1089) -263.64,1089 -248.82,1103.82 U1.8@-110.9,1103.82 ; -152,1165 U1.10@-142,1155 ; U1.9@-110.9,1129.41 -248.05,1129.41 -262.64,1144 v1(-269,1144) -258,1155 U1.10@-142,1155 ; U1.19 61.72,950.28 27,985 27,1090 -38,1155 U1.10 U1.10@-142,1155
  Bottom Layer w20: v1(-158,1191) -152,1185 -152,1165 -108.94,1165 -97,1176.94 ; U1.10@-107,1159.87 -97,1159.87 -97,1176.94 ; v1(-97,1194) -97,1176.94
  Bottom Layer w30: v1(34.85,782) v1@34.6,782.25 ; v1@34.6,782.25 24.85,792 C9.2 1,802.61 v1(1,782.25) v1@34.6,782.25
  Bottom Layer w40: 195.39,646.2 C8.2@232.09,682.91 ; 195.39,646.2 265.09,646.2 v1(269.27,650.38) 264.62,650.38 C8.2@232.09,682.91 ; 195.39,646.2 v1(176.53,646.2) 176.53,671.53 C8.2 C8.2@232.09,682.91
  Bottom Layer w50: MOD1.4 MOD1.3 -71.2,1300.2 C3.2
  other v1: 222.66,644.92
LED0: J1.2 RN1.6 | length 1871.5
  Top Layer w10: J1.2 -736,287.62 -736,643 -654,725 -391,725 -209,907 344.39,907 356.39,895 v1(361,895)
  Bottom Layer w8: RN1.6 293.16,1023.84 317,1000 317,939 v1(361,895)
LED0_3.3: MOD2.6 U1.4 | length 371.9
  Bottom Layer w10: MOD2.6 -388.38,1076.38 -313.46,1001.46 U1.4
LED1: J2.2 RN1.5 | length 1420.7
  Top Layer w10: J2.2 -819.44,787.4 -781.84,825 -332,825 -229,928 355,928 v1(373,946)
  Bottom Layer w8: RN1.5 298.5,1045.5 336,1008 336,983 v1(373,946)
LED1_3.3: MOD2.18 U1.5 | length 876.2
  Bottom Layer w10: U1.5 -72.22,1027.05 -34,988.82 -34,881 -53.19,861.81 -53.19,770.19 4,713 33,713 85,765 367,765 378.38,776.38 MOD2.18
LED2: J3.2 RN2.8 | length 1724.9
  Top Layer w10: J3.2 -697,1248.18 -697,977 -646,926 -346,926 -321,951 320,951 v1(369,1000)
  Bottom Layer w8: RN2.8 310,1091 369,1032 v1(369,1000)
LED2_3.3: MOD2.26 U1.6 | length 1190.4
  Top Layer w10: v1(-23,1046) -23,1045 49,973 296,973 402.23,1079.23 402.23,1105.23 423.38,1126.38 483.2,1126.38 508,1151.18 508,1521.13 MOD2.26
  Bottom Layer w10: U1.6@-110.9,1052.64 -66.64,1052.64 -59,1045 -24,1045 v1(-23,1046)
LED3: J4.2 RN2.7 | length 735.2
  Top Layer w10: v1(545,1096) 579,1130 579,1217 739.95,1377.95 J4.2
  Bottom Layer w8: RN2.7 419.04,1112.65 cw(c452.76,1076.38) 486.44,1112.69 cw(c452.76,1076.38) 486.48,1112.65 cw(c452.76,1076.38) 489.03,1110.1 503.13,1096 v1(545,1096)
LED3_3.3: MOD2.25 U1.7 | length 991.9
  Top Layer w10: v1(-52,1100) -27,1100 79,994 270,994 366.55,1090.55 366.55,1116.55 400,1150 400,1423.62 MOD2.25
  Bottom Layer w10: U1.7@-110.9,1078.23 -73.77,1078.23 v1(-52,1100)
LED4: J5.2 RN1.8 | length 1059.1
  Top Layer w10: v1(282,853) 305,830 305,708 384,629 384,564 422,526 497.62,526 J5.2
  Bottom Layer w8: RN1.8 273.67,861.33 v1(282,853)
LED4_3.3: MOD2.8 U1.2 | length 371.5
  Bottom Layer w10: MOD2.8 -378.62,876.38 -304.72,950.28 U1.2
LED5: J6.2 RN1.7 | length 810.4
  Top Layer w10: v1(338,848) 333.89,843.89 333.89,832.28 333,831.39 333,768 375,726 765.37,726 J6.2
  Bottom Layer w8: RN1.7 288.84,1004.16 299,994 299,887 v1(338,848)
LED5_3.3: MOD2.7 U1.3 | length 341.1
  Bottom Layer w10: MOD2.7 -452.24,975.87 U1.3
LED_EN: MOD2.16 Q2.1 R5.1 | length 2169.9
  Top Layer w10: Q2.1 -314.5,1419 -260,1419 -221,1458 v1(-221,1477) R5.1
  Bottom Layer w10: v1(-221,1477) -222,1476 -314,1476 -359,1431 -359,1410 -359,1275 -323.83,1239.83 -149.99,1239.83 -148.82,1241 15,1241 30,1226 446.62,1226 cw(c452.76,1176.38) 458.89,1226 506.3,1226 cw(c403.21,998.23) 580,1175.01 580,703.62 MOD2.16
NetQ1_1: Q1.1 R3.1 R4.1 | length 237.8
  Top Layer w10: R3.1@-372,1525.46 -366.54,1525.46 -329,1563 -315.54,1563 -296,1582.54 -296,1633.41 -255.17,1674.24 Q1.1
NetQ2_3: Q2.3 R4.2 | length 70.3
  Top Layer w15: Q2.3 -296,1480 R4.2
NetRN1_1: RN1.1 U1.18 | length 126.5
  Bottom Layer w8: U1.18 199.87,975.87 206.5,982.5 RN1.1
NetRN1_2: RN1.2 U1.17 | length 124.9
  Bottom Layer w8: U1.17 166.46,1001.46 169.16,1004.16 RN1.2
NetRN1_3: RN1.3 U1.16 | length 125.1
  Bottom Layer w8: U1.16 148.25,1027.05 148.3,1027 174,1027 177.16,1023.84 RN1.3
NetRN1_4: RN1.4 U1.15 | length 126.7
  Bottom Layer w8: U1.15 181.36,1052.64 188.5,1045.5 RN1.4
NetRN2_1: RN2.1 U1.14 | length 128.4
  Bottom Layer w8: U1.14 181.23,1078.23 194,1091 RN2.1
NetRN2_2: RN2.2 U1.13 | length 126.7
  Bottom Layer w8: U1.13 164.82,1103.82 173.65,1112.65 216.77,1112.65 RN2.2
VIN: C1.1 C3.1 J9.1 MOD1.1 MOD1.2 P2.1 Q1.3 R3.2 | length 584.1
  Top Layer w10: R3.2@-372,1582.54 -372,1613 -318,1667 -318,1830 -294.24,1853.76 Q1.3
  Bottom Layer w50: C3.1 274.8,1300 MOD1.1
VLED: D1.1 J1.1 J2.1 J3.1 J4.1 J5.1 J6.1 Q1.2 | length 115.8
  Top Layer w30: v1(-629,251) -628.6,251 -627.59,252.01 D1.1@-570,252.01 ; D1.1 -571,200.4 -570,199.4 v1(-570,199)
  other v1: -587,1672 -534.75,1672 -482.5,1672 -430.25,1672 -378,1672 -587,1733.33 -534.75,1733.33 -482.5,1733.33 -430.25,1733.33 -378,1733.33 -587,1794.67 -534.75,1794.67 -482.5,1794.67 -430.25,1794.67 -378,1794.67 -587,1856 -534.75,1856 -482.5,1856 -430.25,1856 -378,1856
pads on no net: MOD2.1 MOD2.3 MOD2.4 MOD2.5 MOD2.10 MOD2.13 MOD2.15 MOD2.17 MOD2.19 MOD2.20 MOD2.21 MOD2.22 MOD2.24 RN2.3 RN2.4 RN2.5 RN2.6 U1.11 U1.12

## Polygon pours and split planes (outlines as drawn)
+5V on Top Layer "+5V" (solid, remove dead copper, pour order 2): -182,868 -179,865 152.24,865 177.17,840.08 177.17,569.17 158.2,550.2 -10.2,550.2 -188,728
VIN on Top Layer "+5V" (solid, remove dead copper, pour order 1): -275.69,1655.5 -225.5,1655.5 -166,1596 -166,1267 49,1052 253,1052 375,1174 375,1955 370,1960 -250,1960 -275.69,1934.31 -275.69,1872.03
GND on Layer 1 (split plane): -814.96,1909.04 814.96,1909.04 815.55,1909.1 823.58,1908.78 832.15,1907.77 840.62,1906.08 848.92,1903.74 857.02,1900.75 864.86,1897.14 872.39,1892.92 879.56,1888.13 886.34,1882.79 892.68,1876.93 898.53,1870.59 903.88,1863.81 908.67,1856.64 912.89,1849.11 916.5,1841.27 919.49,1833.18 921.83,1824.87 923.51,1816.41 924.53,1807.84 924.84,1799.8 924.79,1799.21 924.79,-224.41 924.78,-224.41 924.79,-224.41 924.84,-225 924.53,-233.03 923.51,-241.6 921.83,-250.07 919.49,-258.37 916.5,-266.47 912.89,-274.31 908.67,-281.84 903.88,-289.01 898.53,-295.79 892.68,-302.12 886.34,-307.98 879.56,-313.33 872.39,-318.12 864.86,-322.34 857.02,-325.95 848.92,-328.94 840.62,-331.28 832.15,-332.96 823.58,-333.98 815.55,-334.29 814.96,-334.23 394.11,-334.23 394.11,440.94 394.08,441.3 393.76,446.14 392.75,451.24 391.07,456.16 388.77,460.83 385.88,465.16 382.45,469.07 378.54,472.5 374.22,475.39 369.55,477.69 364.62,479.36 359.52,480.38 354.68,480.69 354.33,480.73 -354.33,480.73 -354.69,480.69 -359.52,480.37 -364.62,479.36 -369.55,477.69 -374.22,475.39 -378.54,472.5 -382.45,469.07 -385.88,465.16 -388.77,460.83 -391.07,456.16 -392.75,451.24 -393.76,446.14 -394.08,441.3 -394.11,440.94 -394.11,-334.23 -814.96,-334.23 -815.55,-334.29 -823.58,-333.98 -832.15,-332.96 -840.62,-331.28 -848.92,-328.94 -857.02,-325.95 -864.86,-322.34 -872.39,-318.12 -879.56,-313.33 -886.34,-307.98 -892.68,-302.12 -898.53,-295.79 -903.88,-289.01 -908.67,-281.84 -912.89,-274.31 -916.5,-266.47 -919.49,-258.37 -921.83,-250.07 -923.51,-241.6 -924.53,-233.03 -924.84,-225 -924.79,-224.41 -924.79,1799.21 -924.84,1799.8 -924.53,1807.84 -923.51,1816.41 -921.83,1824.87 -919.49,1833.18 -916.5,1841.27 -912.89,1849.11 -908.67,1856.64 -903.88,1863.81 -898.53,1870.59 -892.68,1876.93 -886.34,1882.79 -879.56,1888.13 -872.39,1892.92 -864.86,1897.14 -857.02,1900.75 -848.92,1903.74 -840.62,1906.08 -832.15,1907.77 -823.58,1908.78 -815.55,1909.1
VLED on Layer 2 (split plane): -814.96,1909.04 814.96,1909.04 815.55,1909.1 823.58,1908.78 832.15,1907.77 840.62,1906.08 848.92,1903.74 857.02,1900.75 864.86,1897.14 872.39,1892.92 879.56,1888.13 886.34,1882.79 892.68,1876.93 898.53,1870.59 903.88,1863.81 908.67,1856.64 912.89,1849.11 916.5,1841.27 919.49,1833.18 921.83,1824.87 923.51,1816.41 924.53,1807.84 924.84,1799.8 924.79,1799.21 924.79,-224.41 924.78,-224.41 924.79,-224.41 924.84,-225 924.53,-233.03 923.51,-241.6 921.83,-250.07 919.49,-258.37 916.5,-266.47 912.89,-274.31 908.67,-281.84 903.88,-289.01 898.53,-295.79 892.68,-302.12 886.34,-307.98 879.56,-313.33 872.39,-318.12 864.86,-322.34 857.02,-325.95 848.92,-328.94 840.62,-331.28 832.15,-332.96 823.58,-333.98 815.55,-334.29 814.96,-334.23 394.11,-334.23 394.11,440.94 394.08,441.3 393.76,446.14 392.75,451.24 391.07,456.16 388.77,460.83 385.88,465.16 382.45,469.07 378.54,472.5 374.22,475.39 369.55,477.69 364.62,479.36 359.52,480.38 354.68,480.69 354.33,480.73 -354.33,480.73 -354.69,480.69 -359.52,480.37 -364.62,479.36 -369.55,477.69 -374.22,475.39 -378.54,472.5 -382.45,469.07 -385.88,465.16 -388.77,460.83 -391.07,456.16 -392.75,451.24 -393.76,446.14 -394.08,441.3 -394.11,440.94 -394.11,-334.23 -814.96,-334.23 -815.55,-334.29 -823.58,-333.98 -832.15,-332.96 -840.62,-331.28 -848.92,-328.94 -857.02,-325.95 -864.86,-322.34 -872.39,-318.12 -879.56,-313.33 -886.34,-307.98 -892.68,-302.12 -898.53,-295.79 -903.88,-289.01 -908.67,-281.84 -912.89,-274.31 -916.5,-266.47 -919.49,-258.37 -921.83,-250.07 -923.51,-241.6 -924.53,-233.03 -924.84,-225 -924.79,-224.41 -924.79,1799.21 -924.84,1799.8 -924.53,1807.84 -923.51,1816.41 -921.83,1824.87 -919.49,1833.18 -916.5,1841.27 -912.89,1849.11 -908.67,1856.64 -903.88,1863.81 -898.53,1870.59 -892.68,1876.93 -886.34,1882.79 -879.56,1888.13 -872.39,1892.92 -864.86,1897.14 -857.02,1900.75 -848.92,1903.74 -840.62,1906.08 -832.15,1907.77 -823.58,1908.78 -815.55,1909.1

## Other copper
Bottom Layer:
  region net +5V: 75.85,911 75.85,911.56 83.59,919.3 109.48,919.3 114.26,924.08 114.26,928.2 112.48,929.99 77.71,929.99 75.69,932 22,932 13.85,924 13.85,879 23.85,869 53.85,869 64.85,858 64.85,844 79.85,829 129.85,829 129.85,891 114.85,906 80.85,906

## Silkscreen, mask and mechanical layers (free items; w line width, h text height)
Top Overlay:
  lines w10: -928.07,-190.41 cw(c-814.96,-224.41) -814.96,-106.3 cw(c-814.96,-224.41) -780.96,-337.52 ; -928.07,1765.21 ccw(c-814.96,1799.21) -780.96,1912.32 ; -174.5,1458 -204.5,1477 ; -174.5,1496 -204.5,1477 ; -49.5,1477 -204.5,1477 ; 780.96,-337.52 cw(c814.96,-224.41) 814.96,-106.3 cw(c814.96,-224.41) 928.07,-190.41 ; 780.96,1912.32 ccw(c814.96,1799.21) 928.07,1765.21
  text "V+" at 580.68,1608.26 h78.74 r270
  text "GND" at -579.66,1513.64 h78.74 r90
  text "3" at 580.3,1391.97 h78.74 r270
  text "1" at -579.72,1367.98 h78.74 r90
  text "GND" at 579.66,1242.27 h78.74 r270
  text "V+" at -580.68,1147.64 h78.74 r90
  text "V+" at 580.68,1017.71 h78.74 r270
  text "GND" at -579.66,923.09 h78.74 r90
  text "5" at 580.7,802.65 h78.74 r270
  text "12" at -579.79,757.7 h78.74 r90
  text "GND" at 579.66,651.71 h78.74 r270
  text "V+" at -580.68,642.54 h78.74 r90
  text "V+" at 580.68,427.16 h78.74 r270
  text "17" at 580.08,228.1 h78.74 r270
  text "33" at -580.99,126.25 h78.74 r90
  text "GND" at 579.66,61.16 h78.74 r270
  text "V+" at -580.68,-33.46 h78.74 r90
Bottom Overlay:
  text "WLED" at -592.85,1529.76 h200 r90
  text "GG 2025" at 688.19,1077.32 h200 r90
  text "WT32-ETH01 v2" at -591.94,1005.99 h200 r90
Bottom Solder:
  rectangle: 259.34,1079 287.34,1165
  rectangle: 218,1079 246,1165
  rectangle: 259.34,971 287.34,1057
  rectangle: 218,971 246,1057
Mechanical 1:
  the board outline again, w10